# EAGLE board Sirene LED &amp; LCD (EAGLE 9.7.0)

Size 166.34 x 103.67 mm. Coordinates in mm from the lower left corner, seen from the top.
Outline: 0,0 166.34,0 166.34,103.67 0,103.67 0,0
Copper layers (1*16): Top 0.035mm / dielectric 1.5mm / Bottom 0.035mm
Design rules "default": minimum track width 6mil, minimum drill 0.35mm, track to track 6mil, track to pad 6mil, pad to pad 6mil, via to via 6mil, smd to smd 6mil, copper to edge 40mil, drill to drill 6mil, minimum pad ring 10mil, minimum via ring 8mil, stop-mask expansion 4mil, vias tented up to drill 0mil, thermal gap 10mil

## Footprints (pad centres in the part's own frame; a part is rotated, then mirrored left to right if it is on the bottom)
LED-RGB-5MM = drill 0.9: B 0.635,0.635; C -0.635,-0.635; G 1.905,-0.635; R -1.905,0.635
RESAD1016W63L850D250B = drill 0.83 pad 1.43: 1 -5.08,0; 2 5.08,0
ARDUINO-UNO-R3-SHIELD = drill 1.016 pad 1.88: 3.3V 24.13,-2.54; 5V 24.13,0; A0 24.13,12.7; A1 24.13,15.24; A2 24.13,17.78; A3 24.13,20.32; A4 24.13,22.86; A5 24.13,25.4; AREF -24.13,-13.97; D2 -24.13,20.32; D3 -24.13,17.78; D4 -24.13,15.24; D5 -24.13,12.7; D6 -24.13,10.16; D7 -24.13,7.62; D8 -24.13,3.81; D9 -24.13,1.27; D10 -24.13,-1.27; D11 -24.13,-3.81; D12 -24.13,-6.35; D13 -24.13,-8.89; GND@0 24.13,2.54; GND@1 24.13,5.08; GND@2 -24.13,-11.43; IOREF 24.13,-7.62; NC 24.13,-10.16; RES 24.13,-5.08; RX -24.13,25.4; SCL -24.13,-19.05; SDA -24.13,-16.51; TX -24.13,22.86; VIN 24.13,7.62
JHD-162A = drill 1.016 long: 1 -19.05,0; 2 -16.51,0; 3 -13.97,0; 4 -11.43,0; 5 -8.89,0; 6 -6.35,0; 7 -3.81,0; 8 -1.27,0; 9 1.27,0; 10 3.81,0; 11 6.35,0; 12 8.89,0; 13 11.43,0; 14 13.97,0; 15 16.51,0; 16 19.05,0

## Placement (x,y rotation side)
D1  LED-RGBRCBG-PTH  [LED-RGB-5MM]  46.25,96 0 top
R1  1k  [RESAD1016W63L850D250B]  136.42,88.38 90 top
R2  220  [RESAD1016W63L850D250B]  47.52,88.38 90 top
R3  220  [RESAD1016W63L850D250B]  50.06,88.38 90 top
R4  220  [RESAD1016W63L850D250B]  42.44,88.38 90 top
U1  ARDUINO-UNO-R3-SHIELD  [ARDUINO-UNO-R3-SHIELD]  47.88,31.6 270 top
U2  LCD-16X2JHD-162A  [JHD-162A]  76.73,96.13 0 top
U3  ARDUINO-UNO-R3-SHIELD  [ARDUINO-UNO-R3-SHIELD]  131.82,29.84 270 top

## Library data of the parts
D1 R1-R4 U1-U3 = Tinkercad

## Nets
D1_B: D1.B R2.2
D1_G: D1.G R3.2
D1_R: D1.R R4.2
U1_D9: R3.1 U1.D9
U1_D10: R2.1 U1.D10
U1_D11: R4.1 U1.D11
U1_GND: D1.C U1.GND@0 U1.GND@1 U1.GND@2 U2.1 U2.3 U3.GND@0 U3.GND@1 U3.GND@2
U2_LED+: R1.2 U2.15
U3_5V: U2.2 U3.5V
U3_D2: U2.14 U3.D2
U3_D3: U2.13 U3.D3
U3_D4: U2.12 U3.D4
U3_D5: U2.11 U3.D5
U3_D10: U2.6 U3.D10
U3_D11: U2.5 U3.D11
U3_D12: U2.4 U3.D12
U3_D13: R1.1 U3.D13

## Tracks (layer width: path | path; a pad name or v marks a point on that pad's centre or on a via)
D1_B  (1 unrouted)
D1_G  (1 unrouted)
D1_R  (1 unrouted)
U1_D9  (1 unrouted)
U1_D10  (1 unrouted)
U1_D11  (1 unrouted)
U1_GND  (8 unrouted)
U2_LED+  (1 unrouted)
U3_5V  (1 unrouted)
U3_D2  (1 unrouted)
U3_D3  (1 unrouted)
U3_D4  (1 unrouted)
U3_D5  (1 unrouted)
U3_D10  (1 unrouted)
U3_D11  (1 unrouted)
U3_D12  (1 unrouted)
U3_D13  (1 unrouted)